# Altium PCB TranRei.PcbDoc
Units mm, origin at the board's own origin, x right, y up, seen from the top; angles counter-clockwise.
Board outline 152.4 x 101.6 mm, 2 copper layers (Top Layer, Bottom Layer); 108 components, 25 nets, 484 pads, 0 vias.
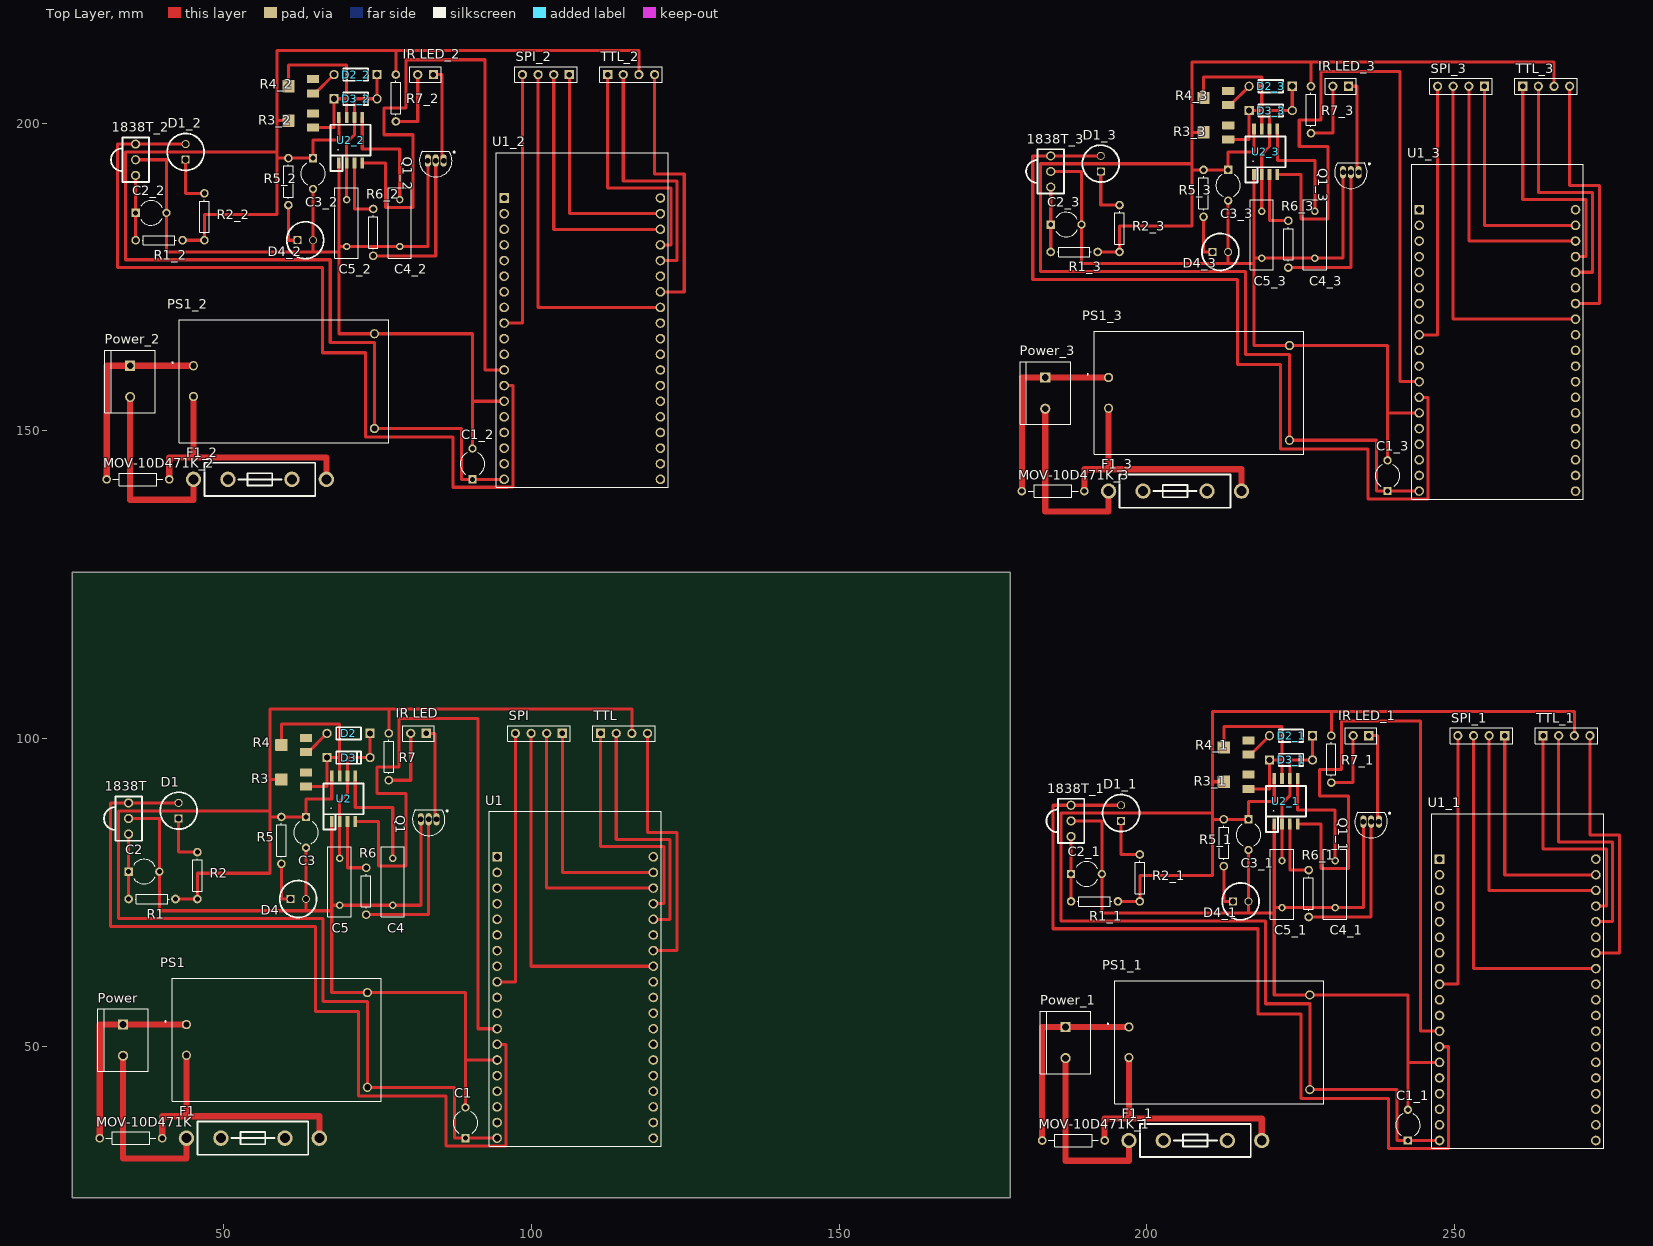
[diagram p0: Top Layer view]
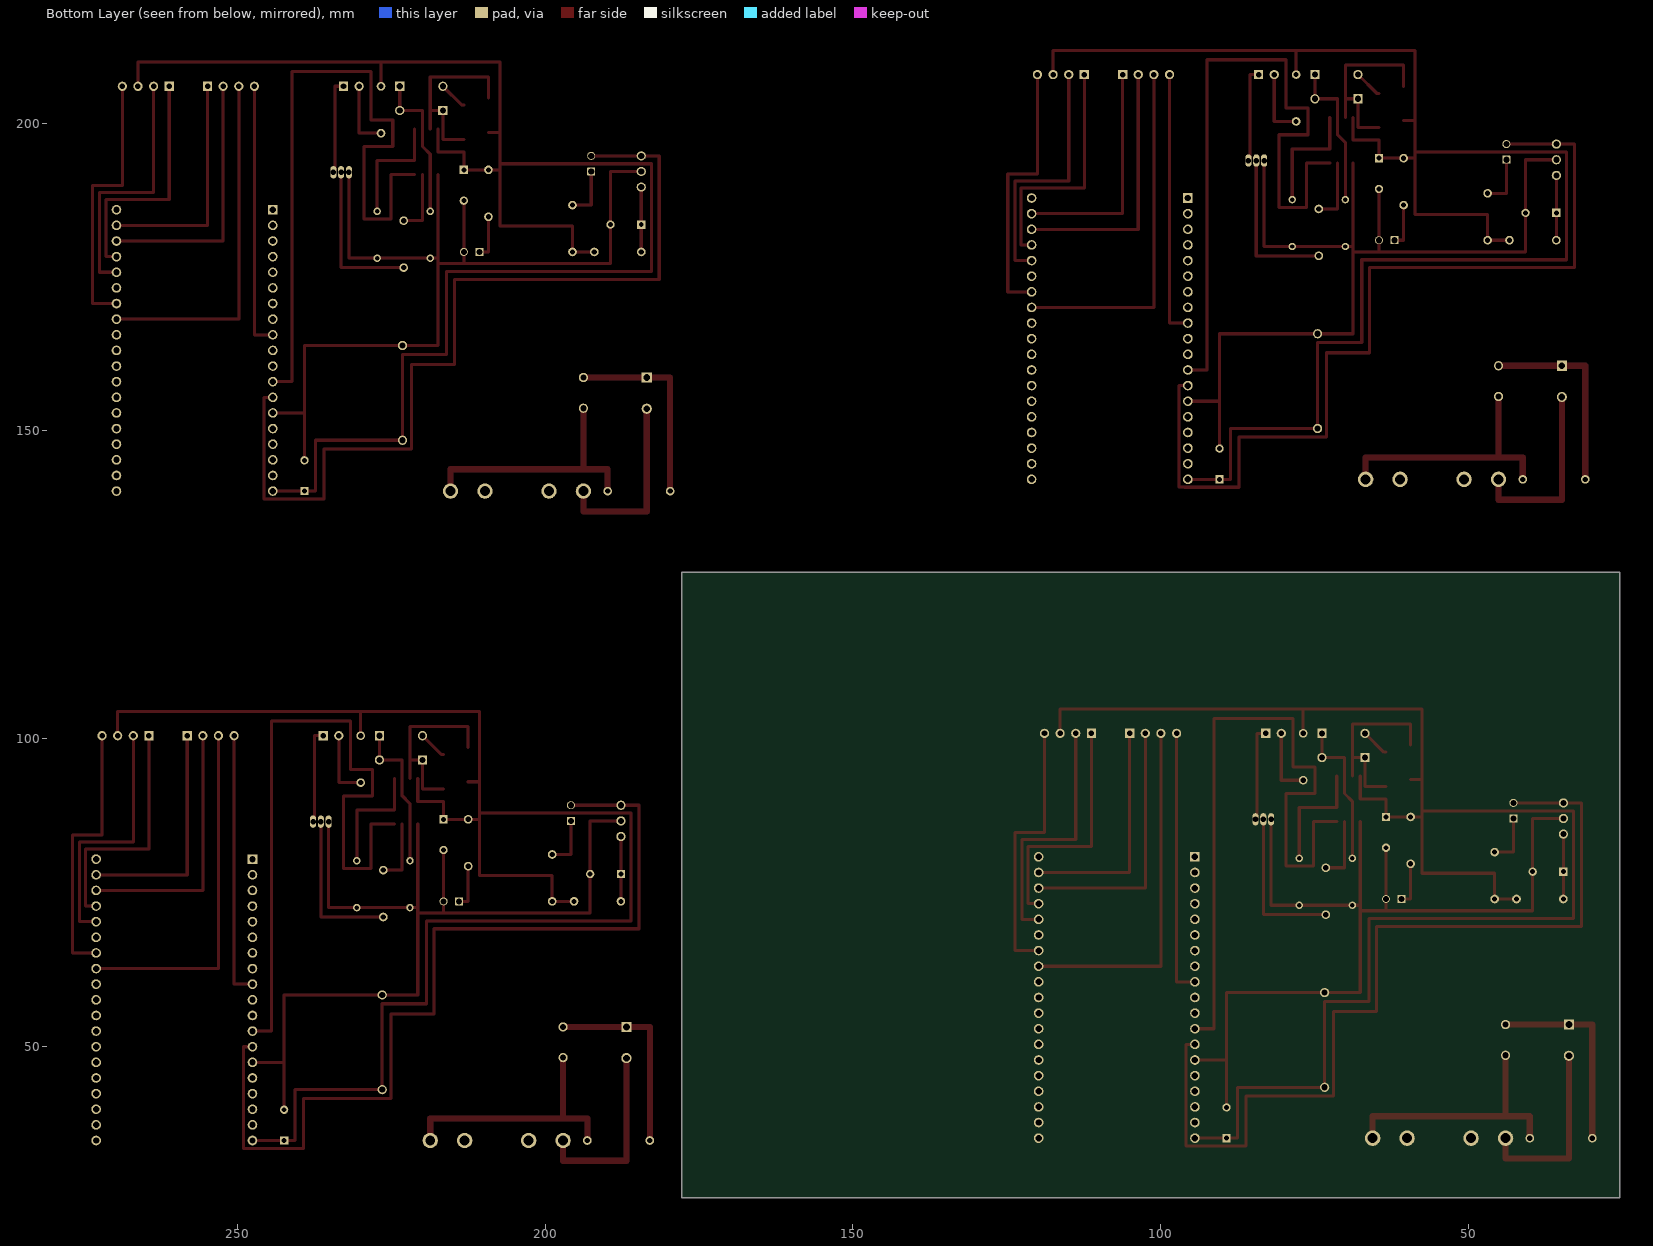
[diagram p1: Bottom Layer view, seen from below]

## Layer stack, top to bottom
Top Solder: solder mask 0.0102, Solder Resist, Dk 3.5
Top Layer: signal copper 0.0356
Dielectric 1: dielectric 0.32, FR-4, Dk 4.8
Bottom Layer: signal copper 0.0356
Bottom Solder: solder mask 0.0102, Solder Resist, Dk 3.5

## Board outline
25.4,25.4 177.8,25.4 177.8,127 25.4,127

## Design rules (kind name [scope] priority, off if disabled: settings)
Clearance [All] p1: gap=0.254 ignorepadtopadclearanceinfootprint=FALSE except(0: Arc-Hole Track-Hole SMDPad-Hole THPad-Hole Via-Hole Fill-Hole Poly-Hole Region-Hole Text-Hole)
PolygonConnect [All] p1: connectstyle=Relief reliefconductorwidth=0.254 reliefentries=4 polygonreliefangle="90 Angle" airgapwidth=0.254
RoutingVias [All] p1: holewidth=0.711 width=1.27 viastyle="Through Hole" minholewidth=0.711 minwidth=1.27 maxholewidth=0.711 maxwidth=1.27
SolderMaskExpansion [All] p1: expansion=0.102
Width [All] p1: maxlimit=1 minlimit=0.3 preferedwidth=0.5
30 further rules are at their usual default settings.

## Classes and differential pairs
component class Sheet1: 1838T C1 C2 C3 C4 C5 D1 D2 D3 D4 F1 "IR LED" MOV-10D471K Power PS1 Q1 R1 R2 R5 R6 R7 SPI TTL U1 U2

## Components (designator, comment, footprint, x,y, rotation, side; value= is the part's Value field where it differs from the comment)
1838T "Header 3" "TSOP 1838T" 34.544,86.995 r270 top
1838T_1 "Header 3" "TSOP 1838T" 187.706,86.614 r270 top (schematic designator 1838T)
1838T_2 "Header 3" "TSOP 1838T" 35.687,194.056 r270 top (schematic designator 1838T)
1838T_3 "Header 3" "TSOP 1838T" 184.404,192.151 r270 top (schematic designator 1838T)
C1 "Cap2" CAPR5-4X5 89.281,37.552 r90 top value=220uF
C1_1 "Cap2" CAPR5-4X5 242.443,37.171 r90 top value=220uF (schematic designator C1)
C1_2 "Cap2" CAPR5-4X5 90.424,144.613 r90 top value=220uF (schematic designator C1)
C1_3 "Cap2" CAPR5-4X5 239.141,142.708 r90 top value=220uF (schematic designator C1)
C2 "Cap2" CAPR5-4X5 37.044,78.359 r0 top value=100uF
C2_1 "Cap2" CAPR5-4X5 190.206,77.978 r0 top value=100uF (schematic designator C2)
C2_2 "Cap2" CAPR5-4X5 38.187,185.42 r0 top value=100uF (schematic designator C2)
C2_3 "Cap2" CAPR5-4X5 186.904,183.515 r0 top value=100uF (schematic designator C2)
C3 "Cap2" CAPR5-4X5 63.373,84.749 r270 top value=100uF
C3_1 "Cap2" CAPR5-4X5 216.535,84.368 r270 top value=100uF (schematic designator C3)
C3_2 "Cap2" CAPR5-4X5 64.516,191.81 r270 top value=100uF (schematic designator C3)
C3_3 "Cap2" CAPR5-4X5 213.233,189.905 r270 top value=100uF (schematic designator C3)
C4 "Cap" RAD-0.3 77.47,76.708 r90 top value=100nF
C4_1 "Cap" RAD-0.3 230.632,76.327 r90 top value=100nF (schematic designator C4)
C4_2 "Cap" RAD-0.3 78.613,183.769 r90 top value=100nF (schematic designator C4)
C4_3 "Cap" RAD-0.3 227.33,181.864 r90 top value=100nF (schematic designator C4)
C5 "Cap" RAD-0.3 68.834,76.708 r90 top value=1nF
C5_1 "Cap" RAD-0.3 221.996,76.327 r90 top value=1nF (schematic designator C5)
C5_2 "Cap" RAD-0.3 69.977,183.769 r90 top value=1nF (schematic designator C5)
C5_3 "Cap" RAD-0.3 218.694,181.864 r90 top value=1nF (schematic designator C5)
D1 "LED" LED 42.672,88.265 r90 top
D1_1 "LED" LED 195.834,87.884 r90 top (schematic designator D1)
D1_2 "LED" LED 43.815,195.326 r90 top (schematic designator D1)
D1_3 "LED" LED 192.532,193.421 r90 top (schematic designator D1)
D2 "Diode 1N4148" Diode 70.287,100.838 r180 top
D2_1 "Diode 1N4148" Diode 223.449,100.457 r180 top (schematic designator D2)
D2_2 "Diode 1N4148" Diode 71.43,207.899 r180 top (schematic designator D2)
D2_3 "Diode 1N4148" Diode 220.147,205.994 r180 top (schematic designator D2)
D3 "Diode 1N4148" Diode 70.287,96.901 r0 top
D3_1 "Diode 1N4148" Diode 223.449,96.52 r0 top (schematic designator D3)
D3_2 "Diode 1N4148" Diode 71.43,203.962 r0 top (schematic designator D3)
D3_3 "Diode 1N4148" Diode 220.147,202.057 r0 top (schematic designator D3)
D4 "LED" LED 62.103,73.914 r0 top
D4_1 "LED" LED 215.265,73.533 r0 top (schematic designator D4)
D4_2 "LED" LED 63.246,180.975 r0 top (schematic designator D4)
D4_3 "LED" LED 211.963,179.07 r0 top (schematic designator D4)
F1 "Fuse" "Fuse Holder" 54.742,35.052 r180 top
F1_1 "Fuse" "Fuse Holder" 207.904,34.671 r180 top (schematic designator F1)
F1_2 "Fuse" "Fuse Holder" 55.885,142.113 r180 top (schematic designator F1)
F1_3 "Fuse" "Fuse Holder" 204.602,140.208 r180 top (schematic designator F1)
"IR LED" "Header 2" HDR1X2 82.931,100.838 r180 top
"IR LED_1" "Header 2" HDR1X2 236.093,100.457 r180 top (schematic designator "IR LED")
"IR LED_2" "Header 2" HDR1X2 84.074,207.899 r180 top (schematic designator "IR LED")
"IR LED_3" "Header 2" HDR1X2 232.791,205.994 r180 top (schematic designator "IR LED")
MOV-10D471K "" AXIAL-0.4 34.925,35.052 r180 top value=1K
MOV-10D471K_1 "" AXIAL-0.4 188.087,34.671 r180 top value=1K (schematic designator MOV-10D471K)
MOV-10D471K_2 "" AXIAL-0.4 36.068,142.113 r180 top value=1K (schematic designator MOV-10D471K)
MOV-10D471K_3 "" AXIAL-0.4 184.785,140.208 r180 top value=1K (schematic designator MOV-10D471K)
Power "282837-2" TE_282837-2 33.655,50.974 r270 top
Power_1 "282837-2" TE_282837-2 186.817,50.593 r270 top (schematic designator Power)
Power_2 "282837-2" TE_282837-2 34.798,158.035 r270 top (schematic designator Power)
Power_3 "282837-2" TE_282837-2 183.515,156.13 r270 top (schematic designator Power)
PS1 "HLK-PM01" HLKPM01 43.942,53.514 r0 top
PS1_1 "HLK-PM01" HLKPM01 197.104,53.133 r0 top (schematic designator PS1)
PS1_2 "HLK-PM01" HLKPM01 45.085,160.575 r0 top (schematic designator PS1)
PS1_3 "HLK-PM01" HLKPM01 193.802,158.67 r0 top (schematic designator PS1)
Q1 "BC547" TO-226-AA 83.312,86.868 r90 top
Q1_1 "BC547" TO-226-AA 236.474,86.487 r90 top (schematic designator Q1)
Q1_2 "BC547" TO-226-AA 84.455,193.929 r90 top (schematic designator Q1)
Q1_3 "BC547" TO-226-AA 233.172,192.024 r90 top (schematic designator Q1)
R1 "Res1" AXIAL-0.3 38.354,73.914 r0 top value=100R
R1_1 "Res1" AXIAL-0.3 191.516,73.533 r0 top value=100R (schematic designator R1)
R1_2 "Res1" AXIAL-0.3 39.497,180.975 r0 top value=100R (schematic designator R1)
R1_3 "Res1" AXIAL-0.3 188.214,179.07 r0 top value=100R (schematic designator R1)
R2 "Res1" AXIAL-0.3 45.72,77.724 r270 top value=1K2
R2_1 "Res1" AXIAL-0.3 198.882,77.343 r270 top value=1K2 (schematic designator R2)
R2_2 "Res1" AXIAL-0.3 46.863,184.785 r270 top value=1K2 (schematic designator R2)
R2_3 "Res1" AXIAL-0.3 195.58,182.88 r270 top value=1K2 (schematic designator R2)
R3 "Res Tap" "Square Trimpot" 61.373,93.352 r90 top value=10K
R3_1 "Res Tap" "Square Trimpot" 214.535,92.971 r90 top value=10K (schematic designator R3)
R3_2 "Res Tap" "Square Trimpot" 62.516,200.413 r90 top value=10K (schematic designator R3)
R3_3 "Res Tap" "Square Trimpot" 211.233,198.508 r90 top value=10K (schematic designator R3)
R4 "Res Tap" "Square Trimpot" 61.373,98.933 r90 top value=20K
R4_1 "Res Tap" "Square Trimpot" 214.535,98.552 r90 top value=20K (schematic designator R4)
R4_2 "Res Tap" "Square Trimpot" 62.516,205.994 r90 top value=20K (schematic designator R4)
R4_3 "Res Tap" "Square Trimpot" 211.233,204.089 r90 top value=20K (schematic designator R4)
R5 "Res1" AXIAL-0.3 59.373,83.439 r270 top value=1K2
R5_1 "Res1" AXIAL-0.3 212.535,83.058 r270 top value=1K2 (schematic designator R5)
R5_2 "Res1" AXIAL-0.3 60.516,190.5 r270 top value=1K2 (schematic designator R5)
R5_3 "Res1" AXIAL-0.3 209.233,188.595 r270 top value=1K2 (schematic designator R5)
R6 "Res1" AXIAL-0.3 73.152,75.184 r270 top value=10K
R6_1 "Res1" AXIAL-0.3 226.314,74.803 r270 top value=10K (schematic designator R6)
R6_2 "Res1" AXIAL-0.3 74.295,182.245 r270 top value=10K (schematic designator R6)
R6_3 "Res1" AXIAL-0.3 223.012,180.34 r270 top value=10K (schematic designator R6)
R7 "Res1" AXIAL-0.3 76.835,97.028 r90 top value=1K2
R7_1 "Res1" AXIAL-0.3 229.997,96.647 r90 top value=1K2 (schematic designator R7)
R7_2 "Res1" AXIAL-0.3 77.978,204.089 r90 top value=1K2 (schematic designator R7)
R7_3 "Res1" AXIAL-0.3 226.695,202.184 r90 top value=1K2 (schematic designator R7)
SPI "Header 4" HDR1X4 105.029,100.838 r180 top
SPI_1 "Header 4" HDR1X4 258.191,100.457 r180 top (schematic designator SPI)
SPI_2 "Header 4" HDR1X4 106.172,207.899 r180 top (schematic designator SPI)
SPI_3 "Header 4" HDR1X4 254.889,205.994 r180 top (schematic designator SPI)
TTL "Header 4" HDR1X4 111.252,100.838 r0 top
TTL_1 "Header 4" HDR1X4 264.414,100.457 r0 top (schematic designator TTL)
TTL_2 "Header 4" HDR1X4 112.395,207.899 r0 top (schematic designator TTL)
TTL_3 "Header 4" HDR1X4 261.112,205.994 r0 top (schematic designator TTL)
U1 "ESP32-DEVKITC-32D" MODULE_ESP32-DEVKITC-32D 107.125,61.012 r0 top
U1_1 "ESP32-DEVKITC-32D" MODULE_ESP32-DEVKITC-32D 260.287,60.631 r0 top (schematic designator U1)
U1_2 "ESP32-DEVKITC-32D" MODULE_ESP32-DEVKITC-32D 108.268,168.073 r0 top (schematic designator U1)
U1_3 "ESP32-DEVKITC-32D" MODULE_ESP32-DEVKITC-32D 256.985,166.168 r0 top (schematic designator U1)
U2 "NE555P" "NE555 SOP" 69.469,90.187 r0 top
U2_1 "NE555P" "NE555 SOP" 222.631,89.806 r0 top (schematic designator U2)
U2_2 "NE555P" "NE555 SOP" 70.612,197.248 r0 top (schematic designator U2)
U2_3 "NE555P" "NE555 SOP" 219.329,195.343 r0 top (schematic designator U2)

## Footprints (in the part's own frame and the unit in brackets; to place one, negate y for a bottom-side part, rotate by r counter-clockwise, add the part's x,y. Pads: shape width x height; smd on the part's side, far side on the other; paste and mask are expansions set on the pad)
AXIAL-0.3 [mm] "Axial Device, Thru-Hole; 2 Leads; 0.3 in Pin Spacing"
  round 1.4 hole 0.85: 1(-3.81,0) 2(3.81,0)
  silkscreen extent -2.77,-0.76 2.77,0.76
AXIAL-0.4 [mm] "Axial Device, Thru-Hole; 2 Leads; 0.4 in Pin Spacing"
  round 1.4 hole 0.85: 1(-5.08,0) 2(5.08,0)
  silkscreen extent -4.06,-1.02 4.06,1.02
CAPR5-4X5 [mm] "Capacitor; 2 Leads"
  rect 1.35x1.35 hole 0.8: 1(-2.5,0)
  round 1.35 hole 0.8: 2(2.5,0)
  silkscreen extent -1.69,-2 1.82,2
Diode [mm] "1N4448"
  rect 1.5x1.5 hole 1 mask+0.1: 1(-3.5,0) 1(-3.5,0)
  round 1.5 hole 1 mask+0.1: 2(3.5,0)
  silkscreen extent -2,-1 2,1
"Fuse Holder" [mm] "5x20mm"
  round 2.5 hole 1.6 mask+0.2: 1(-10.8,0) 1(-10.8,0) 1(-10.8,0) 1(-10.8,0) 1(-10.8,0) 1(-10.8,0) 2(-5.2,0) 2(-5.2,0) 3(5.2,0) 4(10.8,0)
  silkscreen extent -9,-2.7 9,2.7
HDR1X2 [mm] "Connector; Header; 2 Position"
  rect 1.5x1.5 hole 0.9: 1(0,0)
  round 1.5 hole 0.9: 2(2.54,0)
  silkscreen extent -1.27,-1.27 3.81,1.27
HDR1X4 [mm] "Connector; Header; 4 Position"
  rect 1.5x1.5 hole 0.9: 1(0,0)
  round 1.5 hole 0.9: 2(2.54,0) 3(5.08,0) 4(7.62,0)
  silkscreen extent -1.27,-1.27 8.89,1.27
HLKPM01 [mm]
  round 1.5 hole 1: 1(0,0) 2(0,-5) 3(29.4,5.2) 4(29.4,-10.2)
  silkscreen extent -3.5,-12.5 31.7,7.5
LED [mm] "LED"
  rrect10% 1.3x1.3 hole 1 mask+0.1: 1(-1.27,0)
  round 1.3 hole 1 mask+0.1: 2(1.27,0)
  silkscreen extent -3,-3 3,3
MODULE_ESP32-DEVKITC-32D [mm]
  rect 1.56x1.56 hole 1.04: 1(-12.7,19.76)
  round 1.56 hole 1.04: 2(-12.7,17.22) 3(-12.7,14.68) 4(-12.7,12.14) 5(-12.7,9.6) 6(-12.7,7.06) 7(-12.7,4.52) 8(-12.7,1.98) 9(-12.7,-0.56) 10(-12.7,-3.1) 11(-12.7,-5.64) 12(-12.7,-8.18) 13(-12.7,-10.72) 14(-12.7,-13.26) 15(-12.7,-15.8) 16(-12.7,-18.34) 17(-12.7,-20.88) 18(-12.7,-23.42) 19(-12.7,-25.96) 20(12.7,19.76) 21(12.7,17.22) 22(12.7,14.68) 23(12.7,12.14) 24(12.7,9.6) 25(12.7,7.06) 26(12.7,4.52) 27(12.7,1.98) 28(12.7,-0.56) 29(12.7,-3.1) 30(12.7,-5.64) 31(12.7,-8.18) 32(12.7,-10.72) 33(12.7,-13.26) 34(12.7,-15.8) 35(12.7,-18.34) 36(12.7,-20.88) 37(12.7,-23.42) 38(12.7,-25.96)
  silkscreen extent -13.95,-27.25 13.95,27.15
"NE555 SOP" [mm] "PS G8"
  rrect10% 0.6x1.8 smd mask+0.07: 1(-1.905,-3.7) 1(-1.905,-3.7) 2(-0.635,-3.7) 3(0.635,-3.7) 4(1.905,-3.7) 5(1.905,3.7) 6(0.635,3.7) 7(-0.635,3.7) 8(-1.905,3.7)
  Top Layer region: -0.635,-3.065
  Top Layer region: -0.635,-5.097
  silkscreen extent -3.25,-5 3.25,2.5
RAD-0.3 [mm] "Radial Cap, Thru-Hole; 2 Leads; 0.3 in Pin Spacing"
  round 1.2 hole 0.7: 1(-3.81,0) 2(3.81,0)
  silkscreen extent -5.71,-1.91 5.71,1.91
"Square Trimpot" [mm] "3314J-1"
  rrect10% 1.3x2 smd: 1(-1.15,-2) 1(-1.15,-2) 1(-1.15,-2) 2(1.15,-2)
  rrect10% 2x2 smd: 3(0,2)
TE_282837-2 [mm]
  rect 1.65x1.65 hole 1.1: 1(-2.54,0)
  round 1.65 hole 1.1: 2(2.54,0)
  silkscreen extent -5.08,-4.1 5.08,4.1
TO-226-AA [mm] "TO, Flat Index; 3 In-Line, Axial Leads; Body Dia. 4.8mm; Leads 0.55 x 0.51 mm (max)"
  oval 2x1 hole 0.9: 1(0,-1.27) 2(0,0) 3(0,1.27)
  silkscreen extent -2.65,-3.13 1.52,2.65, body extent -2.65,-2.66 1.52,2.66, height 5.33
"TSOP 1838T" [mm] "IR Receiver"
  round 1.5 hole 1 mask+0.1: 1(-2.54,0) 2(0,0) 3(2.54,0)
  silkscreen extent -3.6,-4 3.6,2.15

## Part data
1838T 1838T_1 1838T_2 1838T_3: "Header, 3-Pin", LatestRevisionDate=17-Jul-2002, LatestRevisionNote="Re-released for DXP Platform.", Publisher="Altium Limited"
C1 C1_1 C1_2 C1_3 C2 C2_1 C2_2 C2_3 C3 C3_1 C3_2 C3_3 C4 C4_1 C4_2 C4_3 C5 C5_1 C5_2 C5_3: "Capacitor", Publisher="Altium Limited"
  C1 C1_1 C1_2 C1_3 C2 C2_1 C2_2 C2_3 C3 C3_1 C3_2 C3_3: PackageDescription="Capacitor; 2 Leads", PackageReference=CAPR5-4X5, Published=23-Sep-2002
  C4 C4_1 C4_2 C4_3 C5 C5_1 C5_2 C5_3: LatestRevisionDate=17-Jul-2002, LatestRevisionNote="Re-released for DXP Platform.", PackageDescription="Radial Cap, Thru-Hole; 2 Leads; 0.3 in Pin Spacing", PackageReference=RAD-0.3, Published=8-Jun-2000
D1 D1_1 D1_2 D1_3 D4 D4_1 D4_2 D4_3: library part LED0, "Typical INFRARED GaAs LED", LatestRevisionDate=08-Jul-2005, LatestRevisionNote="Mech Layer 1 removed.", PackageDescription="LED; 2 Leads", PackageReference=LED-0, Published=8-Jun-2000, Publisher="Altium Limited"
D2 D2_1 D2_2 D2_3 D3 D3_1 D3_2 D3_3: library part "Diode 1N4448", "High Conductance Fast Diode", Code_JEDEC=DO-204-AH, ComponentLink1Description="Manufacturer Link", ComponentLink1URL=http://www.fairchildsemi.com/, ComponentLink2Description=Datasheet, ComponentLink2URL=http://www.fairchildsemi.com/ds/1N%2F1N4448.pdf, DatasheetVersion=1997, LatestRevisionDate=17-Jul-2002, LatestRevisionNote="Re-released for DXP Platform.", PackageDescription="Diode, Axial; Body 3.8 x 1.9 mm (LxDia. max), Lead Dia. 0.53 mm (max)", PackageReference=DO-35, Published=8-Jun-2000, Publisher="Altium Limited"
F1 F1_1 F1_2 F1_3: library part "Fuse 2", LatestRevisionDate=17-Jul-2002, LatestRevisionNote="Re-released for DXP Platform.", PackageDescription="Thru-Hole; 2 Leads", PackageReference=PIN-W2/E2.8, Published=8-Jun-2000, Publisher="Altium Limited"
"IR LED" "IR LED_1" "IR LED_2" "IR LED_3": "Header, 2-Pin", LatestRevisionDate=17-Jul-2002, LatestRevisionNote="Re-released for DXP Platform.", Publisher="Altium Limited"
MOV-10D471K MOV-10D471K_1 MOV-10D471K_2 MOV-10D471K_3: library part Res2, "Resistor", LatestRevisionDate=17-Jul-2002, LatestRevisionNote="Re-released for DXP Platform.", PackageDescription="Axial Device, Thru-Hole; 2 Leads; 0.4 in Pin Spacing", PackageReference=AXIAL-0.4, Published=8-Jun-2000, Publisher="Altium Limited"
Power Power_1 Power_2 Power_3: "Connector Terminal Blocks Receptacle 2 Position 5.08mm Solder Straight Thru-Hole 13.5A/Contact", Package=None, Digi-Key_Part_Number=A113320-ND, Digi-Key_Purchase_URL=https://www.digikey.in/product-detail/en/te-connectivity-amp-connectors/282837-2/A113320-ND/2187973?utm_source=snapeda&utm_medium=aggregator&utm_campaign=symbol, MF="TE Connectivity", MP=282837-2, SnapEDA_Link=https://www.snapeda.com/parts/282837-2/TE%20Connectivity%20AMP%20Connectors/view-part/2549980/?ref=snap, TE_purchase_URL=https://www.te.com/usa-en/product-282837-2.html?te_bu=Cor&te_type=disp&te_campaign=seda_glo_cor-seda-global-disp-prtnr-fy19-seda-model-bom-cta_sma-317_1&elqCampaignId=32493
PS1 PS1_1 PS1_2 PS1_3: "<b>Ultra-compact power module</b><p> Source: <a href=\"https://datasheet.lcsc.com/szlcsc/1906201102_HI-LINK-HLK-PM03_C209904.pdf\"> Datasheet </a>", Package="Package Analog Devices", Availability=Unavailable, MF=Hi-link, MP=hlk-pm01, Price=None, SnapEDA_Link=https://www.snapeda.com/parts/hlk-pm01/Hi-link/view-part/2875605/?ref=snap
Q1 Q1_1 Q1_2 Q1_3: library part NPN, "NPN Bipolar Transistor", Code_JEDEC=TO-226-AA, LatestRevisionDate=17-Jul-2002, LatestRevisionNote="Re-released for DXP Platform.", PackageDescription="TO, Flat Index; 3 In-Line, Axial Leads; Body Dia. 4.8mm; Leads 0.55 x 0.51 mm (max)", PackageReference=TO-226-AA, Published=8-Jun-2000, Publisher="Altium Limited"
R1 R1_1 R1_2 R1_3 R2 R2_1 R2_2 R2_3 R5 R5_1 R5_2 R5_3 R6 R6_1 R6_2 R6_3 R7 R7_1 R7_2 R7_3: "Resistor", LatestRevisionDate=17-Jul-2002, LatestRevisionNote="Re-released for DXP Platform.", PackageDescription="Axial Device, Thru-Hole; 2 Leads; 0.3 in Pin Spacing", PackageReference=AXIAL-0.3, Published=8-Jun-2000, Publisher="Altium Limited"
R3 R3_1 R3_2 R3_3 R4 R4_1 R4_2 R4_3: "Tapped Resistor", LatestRevisionDate=17-Jul-2002, LatestRevisionNote="Re-released for DXP Platform.", PackageDescription="Variable Resistor, Thru-Hole; 3 Leads", PackageReference=VR3, Published=24-Mar-1999, Publisher="Altium Limited", Set Position=0.5, Sim Note="Enter the Resistance value and the set point into parameter fields."
SPI SPI_1 SPI_2 SPI_3 TTL TTL_1 TTL_2 TTL_3: "Header, 4-Pin", LatestRevisionDate=17-Jul-2002, LatestRevisionNote="Re-released for DXP Platform.", Publisher="Altium Limited"
U1 U1_1 U1_2 U1_3: "- Transceiver; 802.11 b/g/n _Wi-Fi, WiFi, WLAN_, Bluetooth® Smart Ready 4.x Dual Mode For Use With ESP-WROOM-32", Package=None, Availability=Unavailable, MF="Espressif Systems", MP=ESP32-DEVKITC-32D, Price=None, SnapEDA_Link=https://www.snapeda.com/parts/ESP32-DEVKITC-32D/Espressif%20Systems/view-part/2777395/?ref=snap
U2 U2_1 U2_2 U2_3: "Single Precision Timer", Package="PDIP-8 Texas Instruments", Arrow_Electronics-Purchase-URL=https://snapeda.com/shop?store=Arrow+Electronics&id=2776400, DigiKey-Purchase-URL=https://snapeda.com/shop?store=DigiKey&id=2776400, MF="Texas Instruments", Mouser-Purchase-URL=https://snapeda.com/shop?store=Mouser&id=2776400, MP=NE555P, SnapEDA_Link=https://www.snapeda.com/parts/NE555P/Texas%20Instruments/view-part/2776400/?ref=snap, Texas_Instruments-Purchase-URL=https://snapeda.com/shop?store=Texas+Instruments&id=2776400

## Nets (pads, with @x,y where several pads share a name; then routed paths per layer and width w, separated by ;. In a path a pad name is that pad's centre, name@x,y a point inside that pad or via, vN(x,y) a via of type N, cw(c..) or ccw(c..) an arc to the next point about the centre after c; other vN are vias at no path point)
5VDC: C1.1 C3.1 PS1.4 R1.2 R2.2 R3.3 R5.1 R7.2 TTL.3 U1.19 U2.8 | length 270.8
  Top Layer w0.5: R1.2 R2.2 45.72,78.105 57.531,78.105 57.531,87.249 ; R3.3 57.531,93.352 ; U2.8 67.564,90.17 63.373,90.17 C3.1 R5.1 57.531,87.249 ; R7.2 76.835,104.775 ; U1.19 87.503,35.052 87.503,43.314 PS1.4 73.342,57.277 66.167,57.277 66.167,70.739 32.893,70.739 32.893,88.249 57.515,88.249 57.531,88.265 ; TTL.3 116.332,104.775 76.835,104.775 ; 57.531,87.249 57.531,88.265 ; 57.531,88.265 57.531,93.352 ; 57.531,93.352 57.531,104.775 76.835,104.775
CLK: SPI.3 U1.27 | length 57.7
  Top Layer w0.5: SPI.3 99.949,62.992 U1.27
CS: SPI.2 U1.22 | length 42.5
  Top Layer w0.5: SPI.2 102.489,75.692 U1.22
GND: 1838T.2 C1.2 C2.2 C3.2 C4.1 C5.1 D4.2 PS1.3 Q1.3 U1.14 U2.1 | length 160
  Top Layer w0.5: 1838T.2 39.544,86.995 C2.2 39.544,72.009 63.373,72.009 ; C3.2 D4.2 63.373,72.009 ; U2.1@67.564,86.487 67.564,72.898 ; Q1.3 82.042,72.898 C4.1 C5.1 67.564,72.898 ; C1.2 89.281,47.752 ; U1.14 89.281,47.752 ; 63.373,72.009 67.564,72.009 ; 67.564,72.009 67.564,58.714 PS1.3 89.281,58.714 89.281,47.752 ; 67.564,72.009 67.564,72.898
GND2: TTL.4 U1.26 | length 44
  Top Layer w0.5: TTL.4 118.872,84.709 123.698,84.709 123.698,65.532 U1.26
MISO: SPI.4 U1.9 | length 43.4
  Top Layer w0.5: U1.9 97.409,60.452 SPI.4
MOSI: SPI.1 U1.21 | length 37.4
  Top Layer w0.5: SPI.1 105.029,78.232 U1.21
Net1838T_3: 1838T.3 C2.1 R1.1 | length 10.5
  Top Layer w0.5: R1.1 C2.1 1838T.3
NetC4_2: C4.2 U2.5 | length 19.5
  Top Layer w0.5: U2.5 71.374,88.773 77.47,88.773 C4.2
NetC5_2: C5.2 D2.1 D3.2 U2.2 U2.6 | length 24.5
  Top Layer w0.5: C5.2 U2.2 68.834,89.789 70.104,91.059 U2.6 70.104,96.901 D3.2 D2.1@73.787,100.838
NetD1_1: D1.1 R2.1 | length 8.5
  Top Layer w0.5: D1.1 42.672,81.534 R2.1
NetD2_2: D2.2 R4.1 | length 4.7
  Top Layer w0.5: R4.1@63.373,97.783 63.732,97.783 D2.2
NetD3_1: D3.1 R3.1 R4.3 U2.7 | length 31.5
  Top Layer w0.5: R4.3 59.373,102.362 68.834,102.362 68.834,96.901 ; R3.1@63.373,92.202 66.76,92.202 66.76,96.874 66.787,96.901 68.834,96.901 ; U2.7 68.834,96.901
NetD4_1: D4.1 R5.2 | length 7.2
  Top Layer w0.5: R5.2 59.373,73.914 D4.1
NetF1_1: F1.1 MOV-10D471K.1 PS1.2 | length 42.6
  Top Layer w1: MOV-10D471K.1 40.005,38.608 43.942,38.608 ; PS1.2 43.942,38.608 ; F1.1@65.542,35.052 65.542,38.608 43.942,38.608
NetF1_4: F1.4 Power.2 | length 30.3
  Top Layer w1: Power.2 33.655,31.75 43.942,31.75 F1.4
"NetIR LED_1": "IR LED.1" Q1.1 | length 15.5
  Top Layer w0.5: 82.931,100.838 84.316,100.838 84.316,87.134 Q1.1
"NetIR LED_2": "IR LED.2" R7.1 | length 11.2
  Top Layer w0.5: R7.1 80.391,93.218 80.391,100.838
NetMOV-10D471K_2: MOV-10D471K.2 Power.1 PS1.1 | length 32.6
  Top Layer w1: MOV-10D471K.2 29.845,53.514 Power.1 PS1.1
NetQ1_2: Q1.2 R6.2 | length 25.7
  Top Layer w0.5: R6.2 83.312,71.374 Q1.2
NetR6_1: R6.1 U2.3 | length 10.5
  Top Layer w0.5: U2.3 70.104,78.994 R6.1
NetTTL_1: TTL.1 U1.23 | length 39.7
  Top Layer w0.5: TTL.1 111.252,82.423 121.539,82.423 121.539,73.152 U1.23
NetTTL_2: TTL.2 U1.24 | length 41.7
  Top Layer w0.5: TTL.2 113.792,83.566 122.555,83.566 122.555,70.612 U1.24
R: 1838T.1 D1.2 U1.13 | length 149.1
  Top Layer w0.5: D1.2 1838T.1 31.623,89.535 31.623,69.469 64.897,69.469 64.897,55.626 71.882,55.626 71.882,41.91 86.106,41.91 86.106,33.768 94.957,33.768 94.971,33.782 95.885,33.782 95.885,50.292 U1.13
Trans: U1.12 U2.4 | length 114.1
  Top Layer w0.5: U2.4 75.184,86.487 75.184,79.248 79.629,79.248 79.629,91.059 74.93,91.059 74.93,95.377 78.486,95.377 78.486,103.251 91.313,103.251 91.313,52.832 U1.12
pads on no net: 1838T_1.1 1838T_1.2 1838T_1.3 1838T_2.1 1838T_2.2 1838T_2.3 1838T_3.1 1838T_3.2 1838T_3.3 "IR LED_1.1" "IR LED_1.2" "IR LED_2.1" "IR LED_2.2" "IR LED_3.1" "IR LED_3.2" C1_1.1 C1_1.2 C1_2.1 C1_2.2 C1_3.1 C1_3.2 C2_1.1 C2_1.2 C2_2.1 C2_2.2 C2_3.1 C2_3.2 C3_1.1 C3_1.2 C3_2.1 C3_2.2 C3_3.1 C3_3.2 C4_1.1 C4_1.2 C4_2.1 C4_2.2 C4_3.1 C4_3.2 C5_1.1 C5_1.2 C5_2.1 C5_2.2 C5_3.1 C5_3.2 D1_1.1 D1_1.2 D1_2.1 D1_2.2 D1_3.1 D1_3.2 D2_1.1 D2_1.2 D2_2.1 D2_2.2 D2_3.1 D2_3.2 D3_1.1 D3_1.2 D3_2.1 D3_2.2 D3_3.1 D3_3.2 D4_1.1 D4_1.2 D4_2.1 D4_2.2 D4_3.1 D4_3.2 F1.2 F1.3 F1_1.1 F1_1.2 F1_1.3 F1_1.4 F1_2.1 F1_2.2 F1_2.3 F1_2.4 F1_3.1 F1_3.2 F1_3.3 F1_3.4 MOV-10D471K_1.1 MOV-10D471K_1.2 MOV-10D471K_2.1 MOV-10D471K_2.2 MOV-10D471K_3.1 MOV-10D471K_3.2 Power_1.1 Power_1.2 Power_2.1 Power_2.2 Power_3.1 Power_3.2 PS1_1.1 PS1_1.2 PS1_1.3 PS1_1.4 PS1_2.1 PS1_2.2 PS1_2.3 PS1_2.4 PS1_3.1 PS1_3.2 PS1_3.3 PS1_3.4 Q1_1.1 Q1_1.2 Q1_1.3 Q1_2.1 Q1_2.2 Q1_2.3 Q1_3.1 Q1_3.2 Q1_3.3 R1_1.1 R1_1.2 R1_2.1 R1_2.2 R1_3.1 R1_3.2 R2_1.1 R2_1.2 R2_2.1 R2_2.2 R2_3.1 R2_3.2 R3.2 R3_1.1 R3_1.2 R3_1.3 R3_2.1 R3_2.2 R3_2.3 R3_3.1 R3_3.2 R3_3.3 R4.2 R4_1.1 R4_1.2 R4_1.3 R4_2.1 R4_2.2 R4_2.3 R4_3.1 R4_3.2 R4_3.3 R5_1.1 R5_1.2 R5_2.1 R5_2.2 R5_3.1 R5_3.2 R6_1.1 R6_1.2 R6_2.1 R6_2.2 R6_3.1 R6_3.2 R7_1.1 R7_1.2 R7_2.1 R7_2.2 R7_3.1 R7_3.2 SPI_1.1 SPI_1.2 SPI_1.3 SPI_1.4 SPI_2.1 SPI_2.2 SPI_2.3 SPI_2.4 SPI_3.1 SPI_3.2 SPI_3.3 SPI_3.4 TTL_1.1 TTL_1.2 TTL_1.3 TTL_1.4 TTL_2.1 TTL_2.2 TTL_2.3 TTL_2.4 TTL_3.1 TTL_3.2 TTL_3.3 TTL_3.4 U1.1 U1.2 U1.3 U1.4 U1.5 U1.6 U1.7 U1.8 U1.10 U1.11 U1.15 U1.16 U1.17 U1.18 U1.20 U1.25 U1.28 U1.29 U1.30 U1.31 U1.32 U1.33 U1.34 U1.35 U1.36 U1.37 U1.38 U1_1.1 U1_1.2 U1_1.3 U1_1.4 U1_1.5 U1_1.6 U1_1.7 U1_1.8 U1_1.9 U1_1.10 U1_1.11 U1_1.12 U1_1.13 U1_1.14 U1_1.15 U1_1.16 U1_1.17 U1_1.18 U1_1.19 U1_1.20 U1_1.21 U1_1.22 U1_1.23 U1_1.24 U1_1.25 U1_1.26 U1_1.27 U1_1.28 U1_1.29 U1_1.30 U1_1.31 U1_1.32 U1_1.33 U1_1.34 U1_1.35 U1_1.36 U1_1.37 U1_1.38 U1_2.1 U1_2.2 U1_2.3 U1_2.4 U1_2.5 U1_2.6 U1_2.7 U1_2.8 U1_2.9 U1_2.10 U1_2.11 U1_2.12 U1_2.13 U1_2.14 U1_2.15 U1_2.16 U1_2.17 U1_2.18 U1_2.19 U1_2.20 U1_2.21 U1_2.22 U1_2.23 U1_2.24 U1_2.25 U1_2.26 U1_2.27 U1_2.28 U1_2.29 U1_2.30 U1_2.31 U1_2.32 U1_2.33 U1_2.34 U1_2.35 U1_2.36 U1_2.37 U1_2.38 U1_3.1 U1_3.2 U1_3.3 U1_3.4 U1_3.5 U1_3.6 U1_3.7 U1_3.8 U1_3.9 U1_3.10 U1_3.11 U1_3.12 U1_3.13 U1_3.14 U1_3.15 U1_3.16 U1_3.17 U1_3.18 U1_3.19 U1_3.20 U1_3.21 U1_3.22 U1_3.23 U1_3.24 U1_3.25 U1_3.26 U1_3.27 U1_3.28 U1_3.29 U1_3.30 U1_3.31 U1_3.32 U1_3.33 U1_3.34 U1_3.35 U1_3.36 U1_3.37 U1_3.38 U2_1.1 U2_1.2 U2_1.3 U2_1.4 U2_1.5 U2_1.6 U2_1.7 U2_1.8 U2_2.1 U2_2.2 U2_2.3 U2_2.4 U2_2.5 U2_2.6 U2_2.7 U2_2.8 U2_3.1 U2_3.2 U2_3.3 U2_3.4 U2_3.5 U2_3.6 U2_3.7 U2_3.8
copper on no net: | length 3824.9
  Top Layer w0.5: 35.687,180.975 35.687,185.42 35.687,191.516 ; 35.687,194.056 40.687,194.056 40.687,185.42 40.687,179.07 64.516,179.07 ; 43.307,180.975 46.863,180.975 46.863,185.166 58.674,185.166 58.674,194.31 ; 43.815,194.056 43.815,188.595 46.863,188.595 ; 43.815,196.596 35.687,196.596 32.766,196.596 32.766,176.53 66.04,176.53 66.04,162.687 73.025,162.687 73.025,148.971 87.249,148.971 87.249,140.829 96.1,140.829 96.114,140.843 97.028,140.843 97.028,157.353 95.568,157.353 ; 60.516,186.69 60.516,180.975 61.976,180.975 ; 60.516,200.413 58.674,200.413 ; 60.516,205.994 60.516,209.423 69.977,209.423 69.977,203.962 ; 64.516,189.31 64.516,180.975 64.516,179.07 ; 64.516,199.263 67.903,199.263 67.903,203.935 67.93,203.962 69.977,203.962 ; 64.516,204.844 64.875,204.844 67.93,207.899 ; 68.707,193.548 68.707,179.959 ; 68.707,200.948 68.707,197.231 64.516,197.231 64.516,194.31 60.516,194.31 58.674,194.31 ; 69.977,187.579 69.977,193.548 69.977,196.85 71.247,198.12 71.247,200.948 71.247,203.962 74.93,203.962 74.93,207.899 ; 69.977,200.948 69.977,203.962 ; 71.247,193.548 71.247,186.055 74.295,186.055 ; 72.517,193.548 76.327,193.548 76.327,186.309 80.772,186.309 80.772,198.12 76.073,198.12 76.073,202.438 79.629,202.438 79.629,210.312 92.456,210.312 92.456,159.893 95.568,159.893 ; 72.517,200.948 72.517,195.834 78.613,195.834 78.613,187.579 ; 74.295,178.435 84.455,178.435 84.455,193.929 ; 77.978,200.279 81.534,200.279 81.534,207.899 ; 77.978,207.899 77.978,211.836 ; 83.185,193.929 83.185,179.959 78.613,179.959 69.977,179.959 68.707,179.959 ; 84.074,207.899 85.459,207.899 85.459,194.195 85.725,193.929 ; 90.424,147.113 90.424,154.813 ; 95.568,142.113 88.646,142.113 88.646,150.375 74.485,150.375 74.485,164.338 67.31,164.338 67.31,177.8 34.036,177.8 34.036,195.31 58.658,195.31 58.674,195.326 ; 95.568,154.813 90.424,154.813 ; 95.568,167.513 98.552,167.513 98.552,207.899 ; 101.092,207.899 101.092,170.053 120.968,170.053 ; 103.632,207.899 103.632,182.753 120.968,182.753 ; 106.172,207.899 106.172,185.293 120.968,185.293 ; 112.395,207.899 112.395,189.484 122.682,189.484 122.682,180.213 120.968,180.213 ; 114.935,207.899 114.935,190.627 123.698,190.627 123.698,177.673 120.968,177.673 ; 117.475,207.899 117.475,211.836 77.978,211.836 ; 120.015,207.899 120.015,191.77 124.841,191.77 124.841,172.593 120.968,172.593 ; 184.404,179.07 184.404,183.515 184.404,189.611 ; 184.404,192.151 189.404,192.151 189.404,183.515 189.404,177.165 213.233,177.165 ; 187.706,73.533 187.706,77.978 187.706,84.074 ; 187.706,86.614 192.706,86.614 192.706,77.978 192.706,71.628 216.535,71.628 ; 192.024,179.07 195.58,179.07 195.58,183.261 207.391,183.261 207.391,192.405 ; 192.532,192.151 192.532,186.69 195.58,186.69 ; 192.532,194.691 184.404,194.691 181.483,194.691 181.483,174.625 214.757,174.625 214.757,160.782 221.742,160.782 221.742,147.066 235.966,147.066 235.966,138.924 244.817,138.924 244.831,138.938 245.745,138.938 245.745,155.448 244.285,155.448 ; 195.326,73.533 198.882,73.533 198.882,77.724 210.693,77.724 210.693,86.868 ; 195.834,86.614 195.834,81.153 198.882,81.153 ; 195.834,89.154 187.706,89.154 184.785,89.154 184.785,69.088 218.059,69.088 218.059,55.245 225.044,55.245 225.044,41.529 239.268,41.529 239.268,33.387 248.119,33.387 248.133,33.401 249.047,33.401 249.047,49.911 247.587,49.911 ; 209.233,184.785 209.233,179.07 210.693,179.07 ; 209.233,198.508 207.391,198.508 ; 209.233,204.089 209.233,207.518 218.694,207.518 218.694,202.057 ; 212.535,79.248 212.535,73.533 213.995,73.533 ; 212.535,92.971 210.693,92.971 ; 212.535,98.552 212.535,101.981 221.996,101.981 221.996,96.52 ; 213.233,187.405 213.233,179.07 213.233,177.165 ; 213.233,197.358 216.62,197.358 216.62,202.03 216.647,202.057 218.694,202.057 ; 213.233,202.939 213.592,202.939 216.647,205.994 ; 216.535,81.868 216.535,73.533 216.535,71.628 ; 216.535,91.821 219.922,91.821 219.922,96.493 219.949,96.52 221.996,96.52 ; 216.535,97.402 216.894,97.402 219.949,100.457 ; 217.424,191.643 217.424,178.054 ; 217.424,199.043 217.424,195.326 213.233,195.326 213.233,192.405 209.233,192.405 207.391,192.405 ; 218.694,185.674 218.694,191.643 218.694,194.945 219.964,196.215 219.964,199.043 219.964,202.057 223.647,202.057 223.647,205.994 ; 218.694,199.043 218.694,202.057 ; 219.964,191.643 219.964,184.15 223.012,184.15 ; 220.726,86.106 220.726,72.517 ; 220.726,93.506 220.726,89.789 216.535,89.789 216.535,86.868 212.535,86.868 210.693,86.868 ; 221.234,191.643 225.044,191.643 225.044,184.404 229.489,184.404 229.489,196.215 224.79,196.215 224.79,200.533 228.346,200.533 228.346,208.407 241.173,208.407 241.173,157.988 244.285,157.988 ; 221.234,199.043 221.234,193.929 227.33,193.929 227.33,185.674 ; 221.996,80.137 221.996,86.106 221.996,89.408 223.266,90.678 223.266,93.506 223.266,96.52 226.949,96.52 226.949,100.457 ; 221.996,93.506 221.996,96.52 ; 223.012,176.53 233.172,176.53 233.172,192.024 ; 223.266,86.106 223.266,78.613 226.314,78.613 ; 224.536,86.106 228.346,86.106 228.346,78.867 232.791,78.867 232.791,90.678 228.092,90.678 228.092,94.996 231.648,94.996 231.648,102.87 244.475,102.87 244.475,52.451 247.587,52.451 ; 224.536,93.506 224.536,88.392 230.632,88.392 230.632,80.137 ; 226.314,70.993 236.474,70.993 236.474,86.487 ; 226.695,198.374 230.251,198.374 230.251,205.994 ; 226.695,205.994 226.695,209.931 ; 229.997,92.837 233.553,92.837 233.553,100.457 ; 229.997,100.457 229.997,104.394 ; 231.902,192.024 231.902,178.054 227.33,178.054 218.694,178.054 217.424,178.054 ; 232.791,205.994 234.176,205.994 234.176,192.29 234.442,192.024 ; 235.204,86.487 235.204,72.517 230.632,72.517 221.996,72.517 220.726,72.517 ; 236.093,100.457 237.478,100.457 237.478,86.753 237.744,86.487 ; 239.141,145.208 239.141,152.908 ; 242.443,39.671 242.443,47.371 ; 244.285,140.208 237.363,140.208 237.363,148.47 223.202,148.47 223.202,162.433 216.027,162.433 216.027,175.895 182.753,175.895 182.753,193.405 207.375,193.405 207.391,193.421 ; 244.285,152.908 239.141,152.908 ; 244.285,165.608 247.269,165.608 247.269,205.994 ; 247.587,34.671 240.665,34.671 240.665,42.933 226.504,42.933 226.504,56.896 219.329,56.896 219.329,70.358 186.055,70.358 186.055,87.868 210.677,87.868 210.693,87.884 ; 247.587,47.371 242.443,47.371 ; 247.587,60.071 250.571,60.071 250.571,100.457 ; 249.809,205.994 249.809,168.148 269.685,168.148 ; 252.349,205.994 252.349,180.848 269.685,180.848 ; 253.111,100.457 253.111,62.611 272.987,62.611 ; 254.889,205.994 254.889,183.388 269.685,183.388 ; 255.651,100.457 255.651,75.311 272.987,75.311 ; 258.191,100.457 258.191,77.851 272.987,77.851 ; 261.112,205.994 261.112,187.579 271.399,187.579 271.399,178.308 269.685,178.308 ; 263.652,205.994 263.652,188.722 272.415,188.722 272.415,175.768 269.685,175.768 ; 264.414,100.457 264.414,82.042 274.701,82.042 274.701,72.771 272.987,72.771 ; 266.192,205.994 266.192,209.931 226.695,209.931 ; 266.954,100.457 266.954,83.185 275.717,83.185 275.717,70.231 272.987,70.231 ; 268.732,205.994 268.732,189.865 273.558,189.865 273.558,170.688 269.685,170.688 ; 269.494,100.457 269.494,104.394 229.997,104.394 ; 272.034,100.457 272.034,84.328 276.86,84.328 276.86,65.151 272.987,65.151 ; 58.674,194.31 58.674,195.326 ; 58.674,195.326 58.674,200.413 ; 58.674,200.413 58.674,211.836 77.978,211.836 ; 64.516,179.07 68.707,179.07 ; 68.707,179.07 68.707,179.959 ; 68.707,179.07 68.707,165.775 74.485,165.775 90.424,165.775 90.424,154.813 ; 207.391,192.405 207.391,193.421 ; 207.391,193.421 207.391,198.508 ; 207.391,198.508 207.391,209.931 226.695,209.931 ; 210.693,86.868 210.693,87.884 ; 210.693,87.884 210.693,92.971 ; 210.693,92.971 210.693,104.394 229.997,104.394 ; 213.233,177.165 217.424,177.165 ; 216.535,71.628 220.726,71.628 ; 217.424,177.165 217.424,178.054 ; 217.424,177.165 217.424,163.87 223.202,163.87 239.141,163.87 239.141,152.908 ; 220.726,71.628 220.726,72.517 ; 220.726,71.628 220.726,58.333 226.504,58.333 242.443,58.333 242.443,47.371
  Top Layer w1: 30.988,142.113 30.988,160.575 34.798,160.575 45.085,160.575 ; 34.798,155.495 34.798,138.811 45.085,138.811 45.085,142.113 ; 41.148,142.113 41.148,145.669 45.085,145.669 ; 45.085,155.575 45.085,145.669 ; 66.685,142.113 66.685,145.669 45.085,145.669 ; 179.705,140.208 179.705,158.67 183.515,158.67 193.802,158.67 ; 183.007,34.671 183.007,53.133 186.817,53.133 197.104,53.133 ; 183.515,153.59 183.515,136.906 193.802,136.906 193.802,140.208 ; 186.817,48.053 186.817,31.369 197.104,31.369 197.104,34.671 ; 189.865,140.208 189.865,143.764 193.802,143.764 ; 193.167,34.671 193.167,38.227 197.104,38.227 ; 193.802,153.67 193.802,143.764 ; 197.104,48.133 197.104,38.227 ; 215.402,140.208 215.402,143.764 193.802,143.764 ; 218.704,34.671 218.704,38.227 197.104,38.227